# Altium PCB Switch_Board.PcbDoc
Units mm, origin at the board's own origin, x right, y up, seen from the top; angles counter-clockwise.
Board outline 114 x 50 mm, 2 copper layers (Top Layer, Bottom Layer); 33 components, 20 nets, 132 pads, 539 vias.
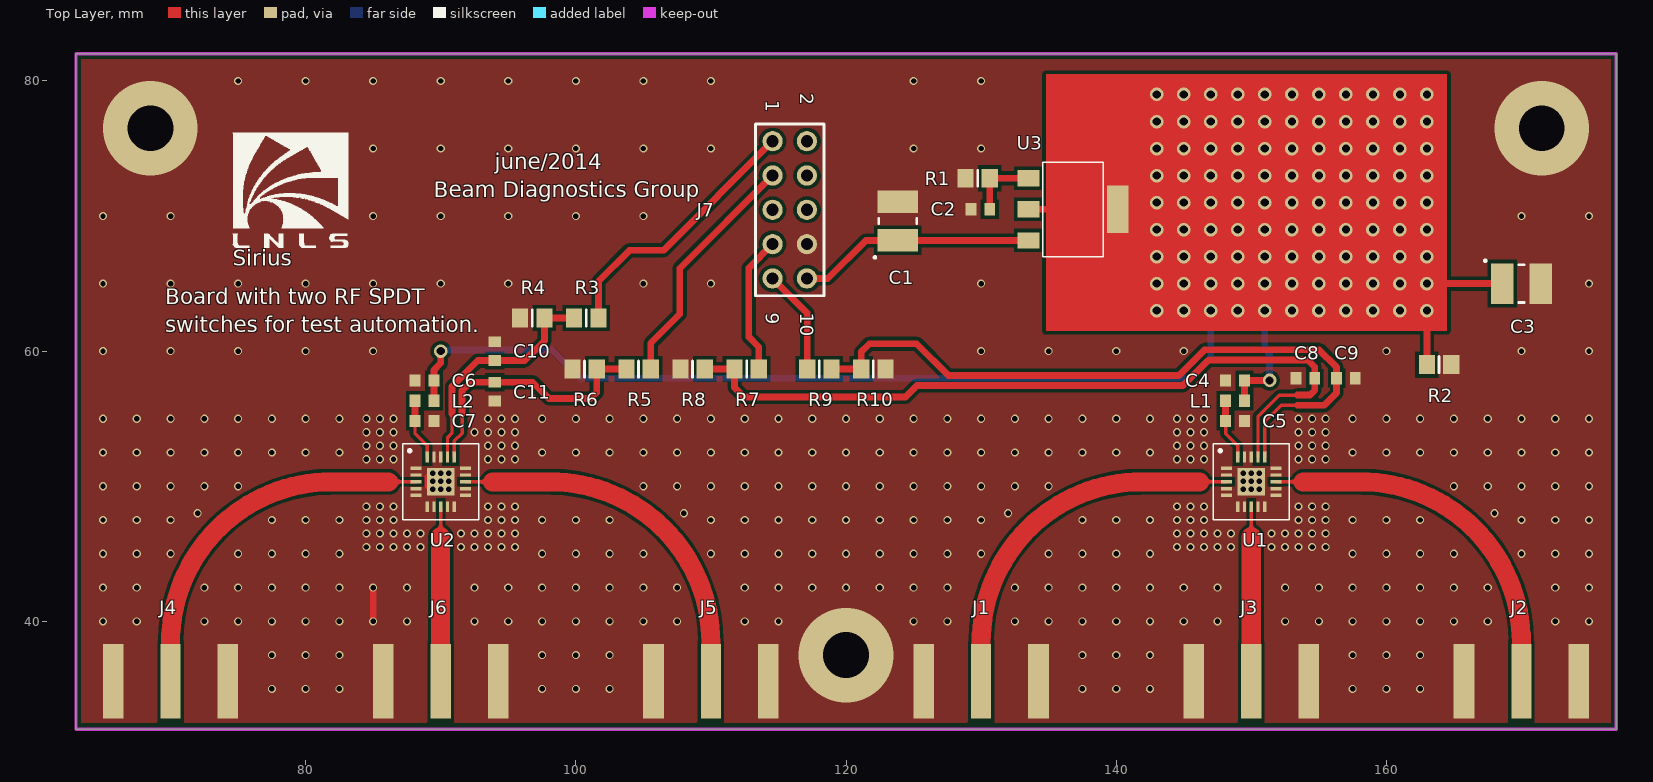
[diagram p0: Top Layer view]
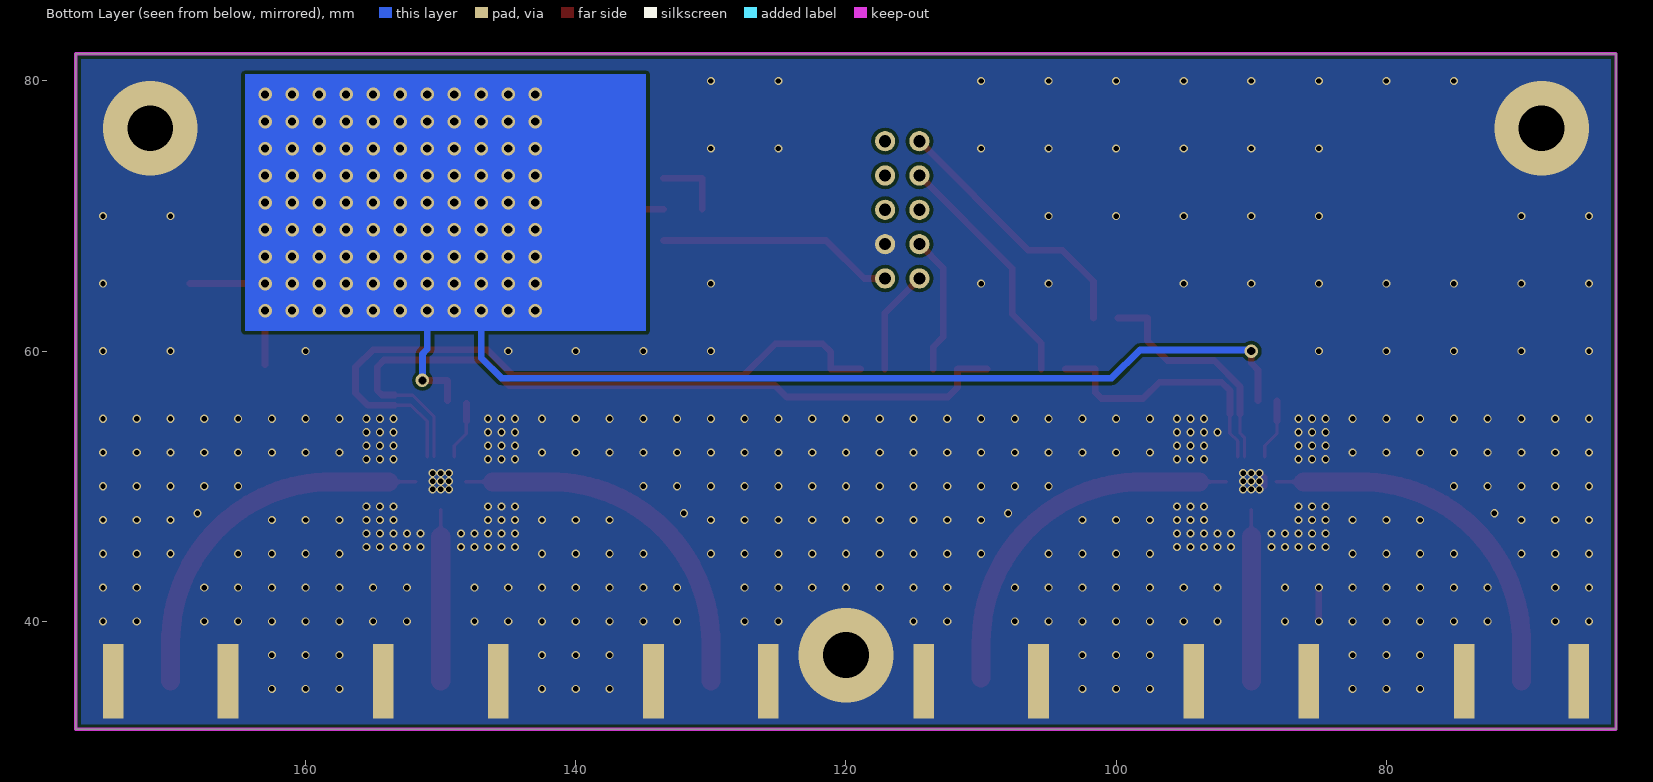
[diagram p1: Bottom Layer view, seen from below]

## Layer stack, top to bottom
Top Layer: signal copper 0.0356
Dielectric: dielectric 0.32, FR-4, Dk 4.8
Bottom Layer: signal copper 0.0356

## Board outline
63,32 177,32 177,82 63,82

## Design rules (kind name [scope] priority, off if disabled: settings)
Clearance [All] p1: gap=0.25
HoleSize [All] p1: absolutevalues=TRUE maxlimit=3.4 minlimit=0.254 maxpercent=80.000 minpercent=20.000
MinimumSolderMaskSliver [All] p1: minsoldermaskwidth=0.1
PolygonConnect [All] p1: connectstyle=Direct reliefconductorwidth=0.254 reliefentries=4 polygonreliefangle="90 Angle" airgapwidth=0.254
RoutingVias [All] p1: holewidth=0.254 width=0.5 viastyle="Through Hole" minholewidth=0.254 minwidth=0.5 maxholewidth=3.4 maxwidth=6
SilkToSolderMaskClearance [IsPad] p1: minsilkscreentomaskgap=0.1 clearancetoexposedcopper=TRUE
SolderMaskExpansion [All] p1: expansion=0.102
Width [All] p1: maxlimit=1.41 minlimit=0.25 preferedwidth=1.41 minimp=50.000000 maximp=50.000000 favimp=50.000000
25 further rules are at their usual default settings.

## Components (designator, comment, footprint, x,y, rotation, side; value= is the part's Value field where it differs from the comment)
C1 "Capacitor (polarized)" "EIA 3528-21" 123.829,69.625 r90 top
C2 "Capacitor" 0603C 129.942,70.5 r0 top
C3 "Capacitor (polarized)" "EIA 3528-21" 170,65 r0 top
C4 "Capacitor" 0603C 148.798,57.832 r0 top
C5 "Capacitor" 0603C 148.798,54.832 r180 top
C6 "Capacitor" 0603C 88.798,57.832 r0 top
C7 "Capacitor" 0603C 88.798,54.832 r180 top
C8 "Capacitor" 0603C 154,58 r0 top
C9 "Capacitor" 0603C 157,58 r180 top
C10 "Capacitor" 0603C 94,60 r270 top
C11 "Capacitor" 0603C 94,57 r90 top
J1 "SMA connector" "SMA edge connector" 130,31.993 r0 top
J2 "SMA connector" "SMA edge connector" 170,31.993 r0 top
J3 "SMA connector" "SMA edge connector" 150,31.993 r0 top
J4 "SMA connector" "SMA edge connector" 70,31.993 r0 top
J5 "SMA connector" "SMA edge connector" 110,31.993 r0 top
J6 "SMA connector" "SMA edge connector" 90,31.993 r0 top
J7 "IDC10" IDC10 114.565,75.543 r270 top
L1 "Inductor" 0603I 148.798,56.332 r180 top
L2 "Inductor" 0603I 88.798,56.332 r180 top
R1 "Resistor" 0805 129.742,72.8 r0 top
R2 "Resistor" 0805 163.9,59 r180 top
R3 "Resistor" 0805 100.773,62.458 r0 top
R4 "Resistor" 0805 96.773,62.458 r0 top
R5 "Resistor" 0805 104.643,58.674 r0 top
R6 "Resistor" 0805 100.643,58.674 r0 top
R7 "Resistor" 0805 112.643,58.674 r0 top
R8 "Resistor" 0805 108.643,58.674 r0 top
R9 "Resistor" 0805 118.023,58.674 r180 top
R10 "Resistor" 0805 122.023,58.674 r180 top
U1 "HSWA2-30DR+" DG983-1 150,50.329 r0 top
U2 "HSWA2-30DR+" DG983-1 90,50.329 r0 top
U3 "LT3080" SOT-223 136.808,70.5 r0 top

## Footprints (in the part's own frame and the unit in brackets; to place one, negate y for a bottom-side part, rotate by r counter-clockwise, add the part's x,y. Pads: shape width x height; smd on the part's side, far side on the other; paste and mask are expansions set on the pad)
0603C [mm] "Chip capacitor, body 1.6 mm x 0.8 mm, IPC high density"
  rect 0.8x0.9 smd: 1(-0.7,0) 2(0.7,0)
  body extent -0.87,-0.48 0.88,0.48, height 0.45
0603I [mm] "Chip inductor, body 1.6 mm x 0.8 mm, IPC high density"
  rect 0.8x0.9 smd: 1(-0.7,0) 2(0.7,0)
  body extent -0.87,-0.48 0.88,0.48, height 0.45
0805 [mm] "Chip resistor, body 2.0 mm x 1.2 mm, IPC medium density"
  rect 1.2x1.4 smd: 1(-0.9,0) 2(0.9,0)
  silkscreen extent 0,-0.6 0,0.6, body extent -1.07,-0.7 1.08,0.7, height 0.45
DG983-1 [mm]
  rect 0.81x0.25 smd paste+0 mask+0.05: 1(-1.845,1) 2(-1.845,0.5) 3(-1.845,0) 4(-1.845,-0.5) 5(-1.845,-1) 11(1.845,-1) 12(1.845,-0.5) 13(1.845,0) 14(1.845,0.5) 15(1.845,1)
  rect 0.25x0.81 smd paste+0 mask+0.05: 6(-1,-1.845) 7(-0.5,-1.845) 8(0,-1.845) 9(0.5,-1.845) 10(1,-1.845) 16(1,1.845) 17(0.5,1.845) 18(0,1.845) 19(-0.5,1.845) 20(-1,1.845)
  rect 2.06x2.06 smd paste+0 mask+0.05: GND(0,0)
  silkscreen extent -2.8,-2.8 2.8,2.8, body extent -2,-2 2,2, height 0.9
"EIA 3528-21" [mm] "Chip capacitor, body 3.50 x 2.80mm, IPC medium density"
  rect 1.65x3 smd: 1(-1.425,0) 2(1.425,0)
  silkscreen extent -2.76,-1.4 0.2,1.76, body extent -1.85,-1.5 1.85,1.5, height 2.1
IDC10 [mm] "IDC connector, 10 pin, right angle"
  round 1.5 hole 0.9: 1(0,0) 2(0,2.54) 3(2.54,0) 4(2.54,2.54) 5(5.08,0) 6(5.08,2.54) 7(7.62,0) 8(7.62,2.54) 9(10.16,0) 10(10.16,2.54)
  silkscreen extent -1.27,-1.27 11.43,3.81, body extent -5.08,-3.17 15.24,6.05, height 9.22
"SMA edge connector" [mm] "SMA 50 ohm PCB edge jack"
  rect 1.524x5.5 smd: GND(-4.252,3.575) GND(4.248,3.575)
  rect 1.524x5.5 smd far side: GND(-4.252,3.575) GND(4.248,3.575)
  rect 1.5x5.5 smd: RF(-0.002,3.575)
  body extent -5,-8.7 5,5.57, height 3.96
SOT-223 [mm] "SOT-223 footprint"
  rect 1.6x1.2 smd paste+0 mask+0.05: IN(-3.3,-2.3) OUT(-3.3,0) SET(-3.3,2.3)
  rect 1.6x3.5 smd paste+0 mask+0.05: OUT(3.3,0)
  silkscreen extent -2.25,-3.5 2.25,3.5, body extent -3.3,-3.35 3.3,3.35, height 1.8

## Part data
C1 C3: "General symbol for a surface-mount polarized capacitor"
C2 C4 C5 C6 C7 C8 C9 C10 C11: "General symbol for a surface-mount capacitor"
J1 J2 J3 J4 J5 J6: "SMA PCB jack"
J7: "IDC connector, 10 pin, right angle"
L1 L2: "General symbol for a surface-mount inductor"
R1 R2 R3 R4 R5 R6 R7 R8 R9 R10: "General symbol for a surface-mount resistor"
U1 U2: "Mini-Circuits surface-mount RF switch"
U3: "Linear Technology surface-mount adjustable voltage regulator"

## Via types
v1: diameter 0.6, hole 0.4, Top Layer to Bottom Layer, 435 vias
v2: diameter 1, hole 0.6, Top Layer to Bottom Layer, 101 vias
v3: diameter 7, hole 3.4, Top Layer to Bottom Layer, 3 vias

## Nets (pads, with @x,y where several pads share a name; then routed paths per layer and width w, separated by ;. In a path a pad name is that pad's centre, name@x,y a point inside that pad or via, vN(x,y) a via of type N, cw(c..) or ccw(c..) an arc to the next point about the centre after c; other vN are vias at no path point)
GND: C1.2 C2.1 C3.2 C4.1 C5.1 C6.1 C7.1 C8.1 C9.1 C10.1 C11.1 J1.GND J2.GND J3.GND J4.GND J5.GND J6.GND J7.8 R1.1 R2.1 R4.1 R6.1 R8.1 R10.1 U1.1 U1.2 U1.4 U1.5 U1.6 U1.7 U1.9 U1.10 U1.11 U1.12 U1.14 U1.15 U1.18 U1.19 U1.GND U2.1 U2.2 U2.4 U2.5 U2.6 U2.7 U2.9 U2.10 U2.11 U2.12 U2.14 U2.15 U2.18 U2.19 U2.GND | length 3.2
  Top Layer w0.5: v1(85,40) v1(85,42.5) ; U2.GND@89.06,49.997 U2.GND@89.06,50.661
  other v1: 77.5,35 80,35 82.5,35 97.5,35 100,35 102.5,35 137.5,35 140,35 142.5,35 157.5,35 160,35 162.5,35 77.5,37.5 80,37.5 82.5,37.5 97.5,37.5 100,37.5 102.5,37.5 137.5,37.5 140,37.5 142.5,37.5 157.5,37.5 160,37.5 162.5,37.5 65,40 67.5,40 72.5,40 75,40 77.5,40 80,40 82.5,40 87.5,40 92.5,40 95,40 97.5,40 100,40 102.5,40 105,40 107.5,40 112.5,40 115,40 125,40 127.5,40 132.5,40 135,40 137.5,40 140,40 142.5,40 145,40 147.5,40 152.5,40 155,40 157.5,40 160,40 162.5,40 165,40 167.5,40 172.5,40 175,40 65,42.5 67.5,42.5 72.5,42.5 75,42.5 77.5,42.5 80,42.5 82.5,42.5 87.5,42.5 92.5,42.5 95,42.5 97.5,42.5 100,42.5 102.5,42.5 105,42.5 107.5,42.5 112.5,42.5 115,42.5 117.5,42.5 120,42.5 122.5,42.5 125,42.5 127.5,42.5 132.5,42.5 135,42.5 137.5,42.5 140,42.5 142.5,42.5 145,42.5 147.5,42.5 152.5,42.5 155,42.5 157.5,42.5 160,42.5 162.5,42.5 165,42.5 167.5,42.5 172.5,42.5 175,42.5 65,45 67.5,45 70,45 75,45 77.5,45 80,45 82.5,45 97.5,45 100,45 102.5,45 105,45 110,45 112.5,45 115,45 117.5,45 120,45 122.5,45 125,45 127.5,45 130,45 135,45 137.5,45 140,45 142.5,45 157.5,45 160,45 162.5,45 165,45 170,45 172.5,45 175,45 84.5,45.5 85.5,45.5 86.5,45.5 87.5,45.5 88.5,45.5 91.5,45.5 92.5,45.5 93.5,45.5 94.5,45.5 95.5,45.5 144.498,45.5 145.498,45.5 146.498,45.5 147.498,45.5 148.498,45.5 151.498,45.5 152.498,45.5 153.498,45.5 154.498,45.5 155.498,45.5 84.5,46.5 85.5,46.5 86.5,46.5 87.5,46.5 88.5,46.5 91.5,46.5 92.5,46.5 93.5,46.5 94.5,46.5 95.5,46.5 144.498,46.5 145.498,46.5 146.498,46.5 147.498,46.5 148.498,46.5 151.498,46.5 152.498,46.5 153.498,46.5 154.498,46.5 155.498,46.5 65,47.5 67.5,47.5 70,47.5 77.5,47.5 80,47.5 82.5,47.5 84.5,47.5 85.5,47.5 86.5,47.5 93.5,47.5 94.5,47.5 95.5,47.5 97.5,47.5 100,47.5 102.5,47.5 110,47.5 112.5,47.5 115,47.5 117.5,47.5 120,47.5 122.5,47.5 125,47.5 127.5,47.5 130,47.5 137.5,47.5 140,47.5 142.5,47.5 144.498,47.5 145.498,47.5 146.498,47.5 153.498,47.5 154.498,47.5 155.498,47.5 157.5,47.5 160,47.5 162.5,47.5 170,47.5 172.5,47.5 175,47.5 72,48 108,48 132,48 168,48 84.5,48.5 85.5,48.5 86.5,48.5 93.5,48.5 94.5,48.5 95.5,48.5 144.498,48.5 145.498,48.5 146.498,48.5 153.498,48.5 154.498,48.5 155.498,48.5 89.4,49.771 90,49.771 90.6,49.771 149.398,49.771 149.998,49.771 150.598,49.771 65,50 67.5,50 70,50 72.5,50 75,50 105,50 107.5,50 110,50 112.5,50 115,50 117.5,50 120,50 122.5,50 125,50 127.5,50 130,50 132.5,50 135,50 165,50 167.5,50 170,50 172.5,50 175,50 89.4,50.371 90,50.371 90.6,50.371 149.398,50.371 149.998,50.371 150.598,50.371 89.4,50.971 90,50.971 90.6,50.971 149.398,50.971 149.998,50.971 150.598,50.971 84.5,52 85.5,52 86.5,52 93.5,52 94.5,52 95.5,52 144.498,52 145.498,52 146.498,52 153.498,52 154.498,52 155.498,52 65,52.5 67.5,52.5 70,52.5 72.5,52.5 75,52.5 77.5,52.5 80,52.5 82.5,52.5 97.5,52.5 100,52.5 102.5,52.5 105,52.5 107.5,52.5 110,52.5 112.5,52.5 115,52.5 117.5,52.5 120,52.5 122.5,52.5 125,52.5 127.5,52.5 130,52.5 132.5,52.5 135,52.5 137.5,52.5 140,52.5 142.5,52.5 157.5,52.5 160,52.5 162.5,52.5 165,52.5 167.5,52.5 170,52.5 172.5,52.5 175,52.5 84.5,53 85.5,53 86.5,53 93.5,53 94.5,53 95.5,53 144.498,53 145.498,53 146.498,53 153.498,53 154.498,53 155.498,53 84.5,54 85.5,54 86.5,54 92.5,54 93.5,54 94.5,54 95.5,54 144.498,54 145.498,54 146.498,54 153.498,54 154.498,54 155.498,54 65,55 67.5,55 70,55 72.5,55 75,55 77.5,55 80,55 82.5,55 84.5,55 85.5,55 86.5,55 93.5,55 94.5,55 95.5,55 97.5,55 100,55 102.5,55 105,55 107.5,55 110,55 112.5,55 115,55 117.5,55 120,55 122.5,55 125,55 127.5,55 130,55 132.5,55 135,55 137.5,55 140,55 142.5,55 144.498,55 145.498,55 146.498,55 153.498,55 154.498,55 155.498,55 157.5,55 160,55 162.5,55 165,55 167.5,55 170,55 172.5,55 175,55 65,60 70,60 75,60 80,60 85,60 130,60 135,60 140,60 145,60 160,60 170,60 175,60 65,65 70,65 75,65 80,65 85,65 90,65 95,65 105,65 110,65 130,65 175,65 65,70 70,70 85,70 90,70 95,70 100,70 105,70 170,70 175,70 85,75 90,75 95,75 100,75 105,75 110,75 125,75 130,75 75,80 80,80 85,80 90,80 95,80 100,80 105,80 110,80 125,80 130,80
  other v3: 120,37.5 68.5,76.5 171.5,76.5
NetC2_2: C2.2 R1.2 U3.SET | length 5.2
  Top Layer w0.5: C2.2 R1.2 U3.SET
NetC3_1: C3.1 C4.2 C6.2 L1.1 L2.1 R2.2 U3.OUT | length 92.1
  Top Layer w0.5: L2.1 C6.2 89.498,58.607 90,59.109 v2(90,60) v2@89.88,60 ; U3.OUT@133.508,70.5 U3.OUT@140.108,70.5 ; L1.1 C4.2 v2(151.356,57.832) ; R2.2 v2(163,63) ; v2(163,65) C3.1
  Bottom Layer w0.5: v2(90,60) 90.094,60.094 98.236,60.094 100.33,58 145.5,58 147,59.5 v2(147,63) ; v2(151,63) 151,60.14 151.356,59.784 v2(151.356,57.832) ; v2(151,67) 151.856,66.144
  other v2: 143,63 145,63 149,63 153,63 155,63 157,63 159,63 161,63 143,65 145,65 147,65 149,65 151,65 153,65 155,65 157,65 159,65 161,65 143,67 145,67 147,67 149,67 153,67 155,67 157,67 159,67 161,67 163,67 143,69 145,69 147,69 149,69 151,69 153,69 155,69 157,69 159,69 161,69 163,69 143,71 145,71 147,71 149,71 151,71 153,71 155,71 157,71 159,71 161,71 163,71 143,73 145,73 147,73 149,73 151,73 153,73 155,73 157,73 159,73 161,73 163,73 143,75 145,75 147,75 149,75 151,75 153,75 155,75 157,75 159,75 161,75 163,75 143,77 145,77 147,77 149,77 151,77 153,77 155,77 157,77 159,77 161,77 163,77 143,79 145,79 147,79 149,79 151,79 153,79 155,79 157,79 159,79 161,79 163,79
NetJ1_1: J1.RF U1.3 | length 29
  Top Layer w0.25: 146.15,50.329 U1.3@148.15,50.329 ; 146.638,50.021 cw(c147.102,49.825) 147.102,50.329 cw(c147.102,50.833) 146.638,50.637
  Top Layer w1.41: J1.RF 129.998,38.426 cw(c141.898,38.426) 141.898,50.327 146.148,50.327
NetJ2_1: J2.RF U1.13 | length 29
  Top Layer w0.25: U1.13 153.845,50.329 ; 153.357,50.021 ccw(c152.893,49.825) 152.893,50.329 ccw(c152.893,50.833) 153.357,50.637
  Top Layer w1.41: 153.847,50.327 158.097,50.327 cw(c158.097,38.426) 169.998,38.426 J2.RF
NetJ3_1: J3.RF U1.8 | length 13.9
  Top Layer w0.25: 149.692,46.753 ccw(c149.496,47.217) 150,47.217 ccw(c150.504,47.217) 150.308,46.753 ; 150,46.265 U1.8@150,48.265
  Top Layer w1.41: J3.RF 149.998,46.263
NetJ4_1: J4.RF U2.3 | length 29
  Top Layer w0.25: 86.15,50.329 U2.3@88.15,50.329 ; 86.638,50.021 cw(c87.102,49.825) 87.102,50.329 cw(c87.102,50.833) 86.638,50.637
  Top Layer w1.41: J4.RF 69.998,38.426 cw(c81.898,38.426) 81.898,50.327 86.148,50.327
NetJ5_1: J5.RF U2.13 | length 28.7
  Top Layer w0.25: U2.13 93.845,50.329 ; 93.357,50.021 ccw(c92.893,49.825) 92.893,50.329 ccw(c92.893,50.833) 93.357,50.637
  Top Layer w1.41: 93.847,50.327 98.097,50.327 cw(c98.097,38.426) 109.998,38.426 J5.RF@109.998,35.8
NetJ6_1: J6.RF U2.8 | length 13.9
  Top Layer w0.25: 89.692,46.753 ccw(c89.496,47.217) 90,47.217 ccw(c90.504,47.217) 90.308,46.753 ; 90,46.265 U2.8@90,48.265
  Top Layer w1.41: J6.RF 89.998,46.263
NetJ7_1: J7.1 R3.2 | length 19.9
  Top Layer w0.5: R3.2 101.673,65.173 103.962,67.462 106.484,67.462 J7.1
NetJ7_3: J7.3 R5.2 | length 18.1
  Top Layer w0.5: R5.2 105.543,60.592 107.693,62.742 107.693,66.131 J7.3
NetJ7_7: J7.7 R7.2 | length 10.3
  Top Layer w0.5: R7.2@113.547,58.678 R7.2 113.543,60.304 112.807,61.04 112.807,66.165 J7.7
NetJ7_9: J7.9 R9.2 | length 7.8
  Top Layer w0.5: J7.9 117.123,62.825 R9.2
U1-C1: C8.2 R7.1 R8.2 U1.17 | length 57.9
  Top Layer w0.25: U1.17 150.5,55.169 152.081,56.75 153.411,56.75
  Top Layer w0.5: R8.2 R7.1 111.743,57.314 112.446,56.611 124.411,56.611 125.25,57.45 126.514,57.45 144.948,57.45 146.844,59.346 154.192,59.346 154.7,58.838 C8.2 154.7,57.1 154.35,56.75 153.411,56.75
U1-C2: C9.2 R9.1 R10.2 U1.16 | length 51.9
  Top Layer w0.25: U1.16 151,54.799 152.201,56 153.411,56
  Top Layer w0.5: R9.1 R10.2 121.123,59.947 121.723,60.547 125.228,60.547 127.575,58.2 144.637,58.2 146.533,60.096 155.024,60.096 156.3,58.82 C9.2 156.3,56.895 155.405,56 153.411,56
U2-C1: C10.2 R3.1 R4.2 U2.17 | length 17.5
  Top Layer w0.25: U2.17 90.5,53.579 90.83,53.909 90.83,55.348
  Top Layer w0.5: 90.83,55.348 90.83,57.391 92.739,59.3 C10.2 96.21,59.3 97.673,60.763 R4.2 R3.1
U2-C2: C11.2 R5.1 R6.2 U2.16 | length 20
  Top Layer w0.25: U2.16 91,53.353 91.58,53.933 91.58,55.348
  Top Layer w0.5: 91.58,55.348 91.58,57.08 92.2,57.7 C11.2 96.805,57.7 98.01,56.495 101.096,56.495 101.543,56.942 R6.2 R5.1
V+: C1.1 J7.10 U3.IN | length 17.6
  Top Layer w0.5: J7.10 118.647,65.383 121.464,68.2 C1.1 U3.IN
VDD-U1: C5.2 L1.2 U1.20 | length 4.3
  Top Layer w0.25: C5.2 148.096,53.899 148.998,52.997 U1.20
  Top Layer w0.5: C5.2 L1.2@148.098,56.15
VDD-U2: C7.2 L2.2 U2.20 | length 4.5
  Top Layer w0.25: C7.2 88.098,53.899 89,52.997 U2.20
  Top Layer w0.5: C7.2@88.098,54.832 L2.2
pads on no net: J7.2 J7.4 J7.5 J7.6

## Polygon pours and split planes (outlines as drawn)
GND on Top Layer "TOP-GND" (solid, pour order 4): 63,32.5 177,32.5 177,82 63,82
GND on Bottom Layer "BOTTOM-GND" (solid, pour order 2): 63,32 177,32 177,82 63,82

## Keep-outs
Keep-Out Layer:
  the board outline again, w0.254

## Other copper
Top Layer:
  rectangle net NetC3_1: 134.79,61.5 164.5,80.5
Bottom Layer:
  rectangle net NetC3_1: 134.79,61.5 164.5,80.5

## Silkscreen, mask and mechanical layers (free items; w line width, h text height)
Top Overlay:
  drawing of 5 lines, arcs and shapes, not listed
  text "june/2014" at 94,73.075 h2
  text "Beam Diagnostics Group" at 89.5,71 h2
  text "Sirius" at 74.593,65.933 h2
  text "Board with two RF SPDT" at 69.625,63.075 h2
  text "switches for test automation." at 69.625,61.008 h2

## Text inside footprints (layer, text, board x,y; h text height)
J7: Top Overlay "10" at 116.597,62.859 h1 r270; Top Overlay "9" at 114.057,62.859 h1 r270; Top Overlay "1" at 114.057,78.575 h1 r270; Top Overlay "2" at 116.597,79.083 h1 r270